# Altium PCB HRM_0.1.PcbDoc (part 2 of 2)
Units mm, origin at the board's own origin, x right, y up, seen from the top; angles counter-clockwise.
Board outline 50 x 50 mm, 2 copper layers (Top Layer, Bottom Layer), stack 1.62 mm thick; 75 components, 61 nets, 266 pads, 154 vias.
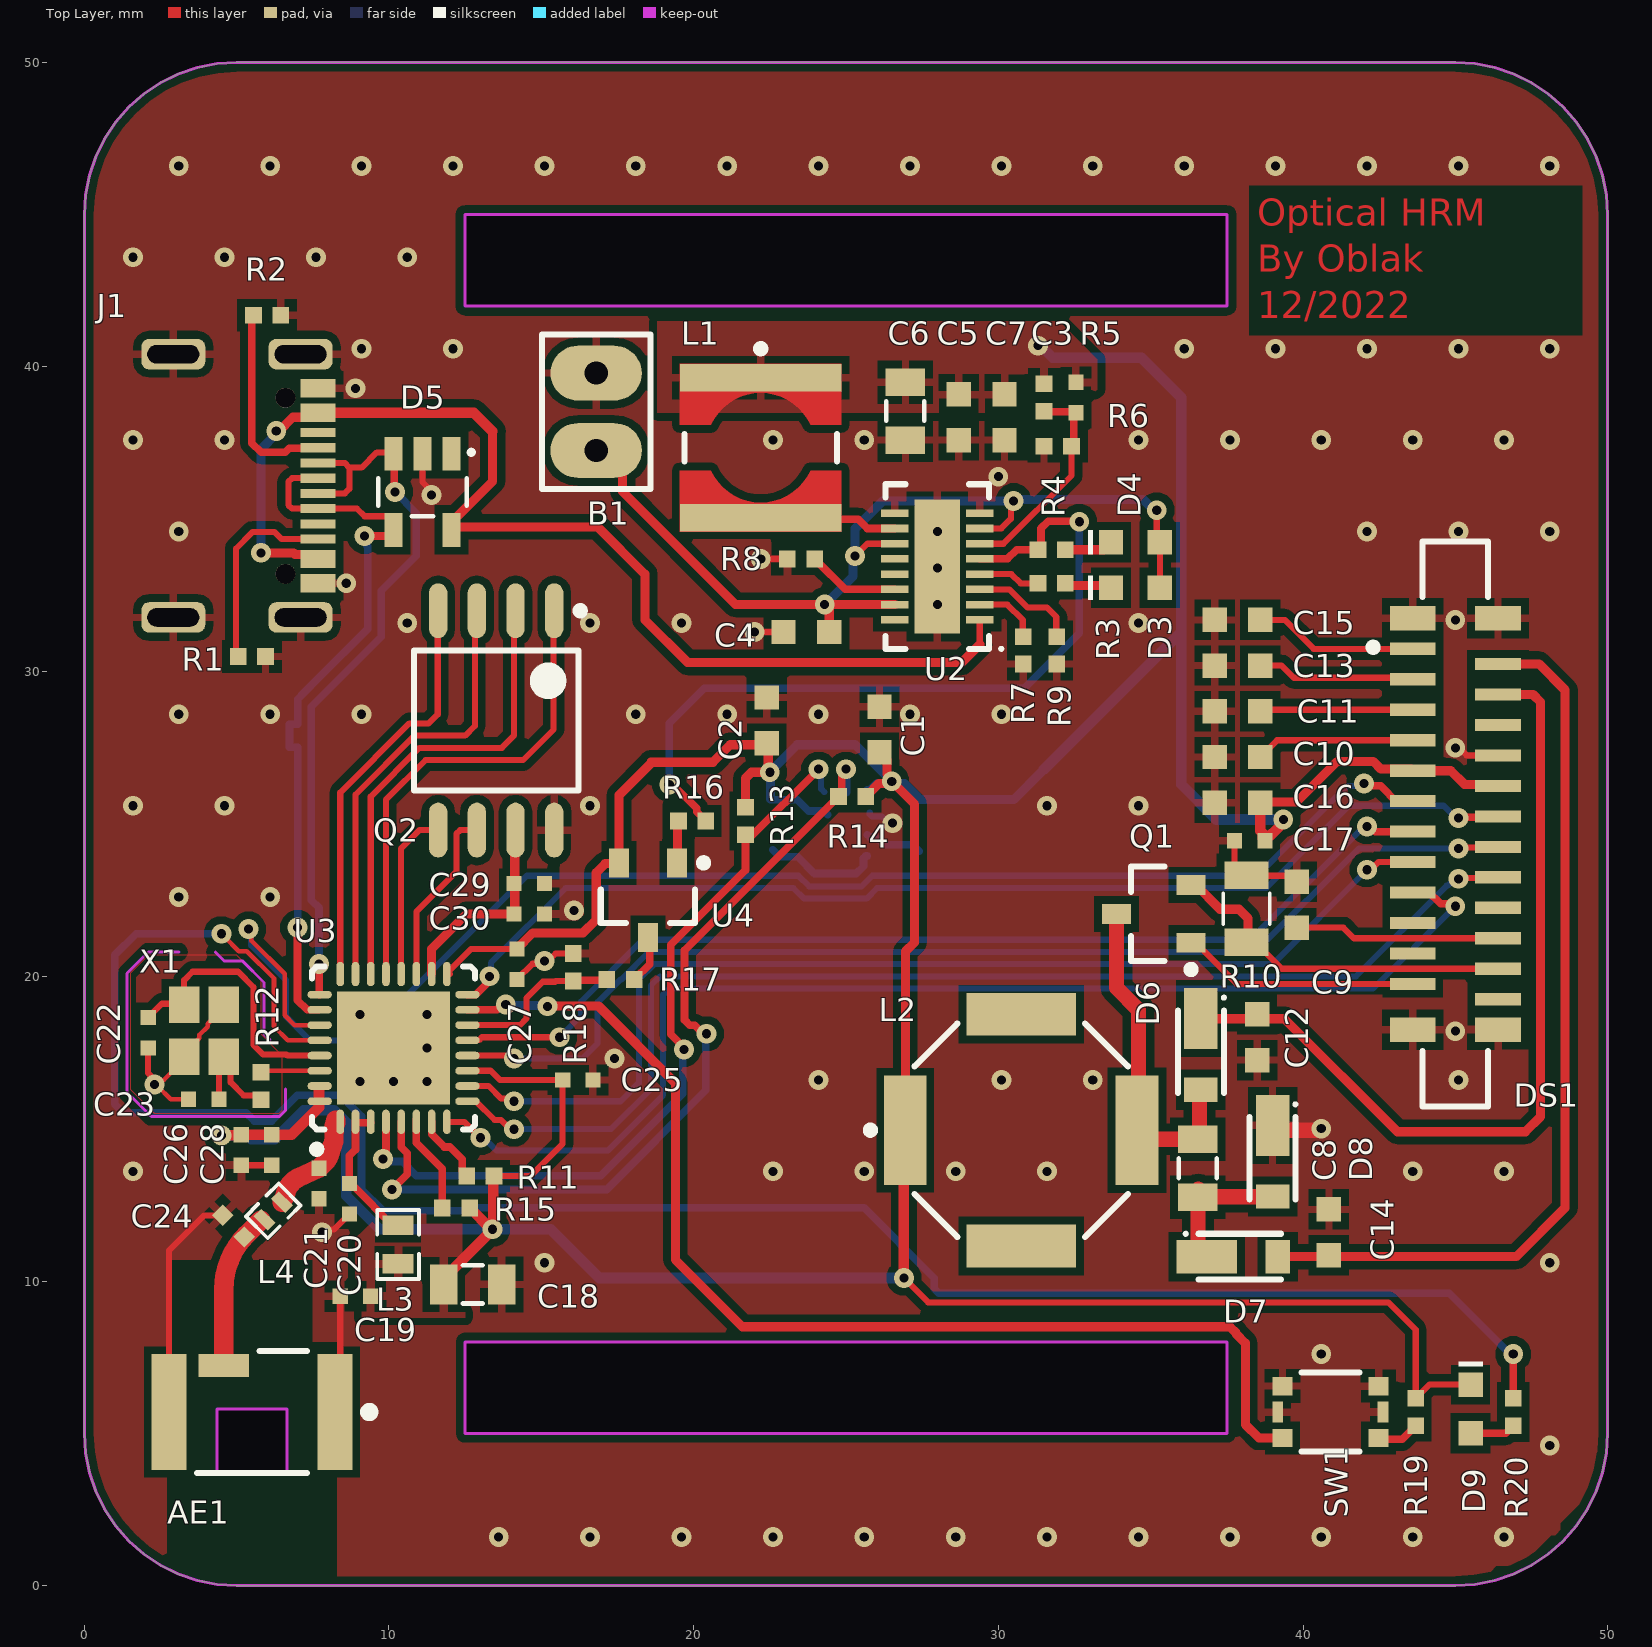
[diagram p0: Top Layer view]

## Silkscreen, mask and mechanical layers (free items; w line width, h text height)
Top Solder:
  rectangle: 38.2,41 49.2,46
Mechanical 1:
  lines w0.1: 0,5 0.043,4.347 0.17,3.706 0.381,3.087 0.67,2.5 1.033,1.956 1.464,1.464 1.956,1.033 2.5,0.67 3.087,0.381 3.706,0.17 4.347,0.043 5,0 45,0 45.653,0.043 46.294,0.17 46.913,0.381 47.5,0.67 48.044,1.033 48.536,1.464 48.967,1.956 49.33,2.5 49.619,3.087 49.83,3.706 49.957,4.347 50,5 50,45 49.957,45.653 49.83,46.294 49.619,46.913 49.33,47.5 48.967,48.044 48.536,48.536 48.044,48.967 47.5,49.33 46.913,49.619 46.294,49.83 45.653,49.957 45,50 5,50 4.347,49.957 3.706,49.83 3.087,49.619 2.5,49.33 1.956,48.967 1.464,48.536 1.033,48.044 0.67,47.5 0.381,46.913 0.17,46.294 0.043,45.653 0,45 0,5 ; 12.5,5 12.5,8 37.5,8 37.5,5 12.5,5 ; 12.5,42 12.5,45 37.5,45 37.5,42 12.5,42